# EAGLE board Controller Board v2 (EAGLE 5.06)

Size 58.09 x 33.01 mm. Coordinates in mm from the lower left corner, seen from the top.
Outline: 0,0 58.09,0 58.09,33.01 0,33.01 0,0
Copper layers (1*2+15*16): Top 0.035mm / dielectric 0.2mm / Route2 0.035mm / dielectric 1.5mm / Route15 0.035mm / dielectric 0.2mm / Bottom 0.035mm
Design rules "4 layer": minimum track width 10mil, minimum drill 24mil, track to track 8mil, track to pad 8mil, pad to pad 8mil, via to via 8mil, smd to smd 8mil, copper to edge 40mil, drill to drill 8mil, minimum pad ring 10mil, minimum via ring 8mil, stop-mask expansion 4mil, vias tented up to drill 0mil, thermal gap 10mil
Holes 3.58 mm at 54.61,17.78 22.86,2.54 17.78,30.48
tRestrict: area 20.3,6.3 to 21.6,27.9
bRestrict: area 20.3,6.3 to 21.6,27.9
Milling: area 20.3,5.1 to 21.6,29.2

## Footprints (pad centres in the part's own frame; a part is rotated, then mirrored left to right if it is on the bottom)
C0805 = smd 1.3 x 1.5: 1 -0.95,0; 2 0.95,0
SOT223 = smd 1.219 x 2.235: 1 -2.311,-3.099; 2 0,-3.099; 3 2.311,-3.099 | smd 3.6 x 2.2: 4 0,3.099
TSSOP8 = smd 0.35 x 1.2: 1 -0.975,-2.925; 2 -0.325,-2.925; 3 0.325,-2.925; 4 0.975,-2.925; 5 0.975,2.925; 6 0.325,2.925; 7 -0.325,2.925; 8 -0.975,2.925
794623-4 = smd 1.3 x 2.92: 1 1.5,10.1; 2 1.5,5.48; 3 -1.5,10.1; 4 -1.5,5.48 | hole 3: 0,0
JP1 = drill 0.914 long: 1 0,-1.27; 2 0,1.27
HC49UP = smd 5.334 x 1.93: 1 -4.826,0; 2 4.826,0
R0603 = smd 1 x 1.1: 1 -0.85,0; 2 0.85,0
MA04-2 = drill 1.016 octagon: 1 -3.81,-1.27; 2 -3.81,1.27; 3 -1.27,-1.27; 4 -1.27,1.27; 5 1.27,-1.27; 6 1.27,1.27; 7 3.81,-1.27; 8 3.81,1.27
P1-13 = drill 1.321 pad 2.159 octagon: 1 0,0
P8X32A-Q44 = smd 1.9 x 0.4: 1 -5.713,4.013; 2 -5.713,3.212; 3 -5.713,2.413; 4 -5.713,1.613; 5 -5.713,0.812; 6 -5.713,0.013; 7 -5.713,-0.787; 8 -5.713,-1.587; 9 -5.713,-2.388; 10 -5.713,-3.188; 11 -5.713,-3.987; 23 5.688,-3.987; 24 5.688,-3.188; 25 5.688,-2.388; 26 5.688,-1.587; 27 5.688,-0.787; 28 5.688,0.013; 29 5.688,0.812; 30 5.688,1.613; 31 5.688,2.413; 32 5.688,3.212; 33 5.688,4.013 | smd 0.4 x 1.9: 12 -4.013,-5.688; 13 -3.212,-5.688; 14 -2.413,-5.688; 15 -1.613,-5.688; 16 -0.812,-5.688; 17 -0.013,-5.688; 18 0.787,-5.688; 19 1.587,-5.688; 20 2.388,-5.688; 21 3.188,-5.688; 22 3.987,-5.688; 34 3.987,5.713; 35 3.188,5.713; 36 2.388,5.713; 37 1.587,5.713; 38 0.787,5.713; 39 -0.013,5.713; 40 -0.812,5.713; 41 -1.613,5.713; 42 -2.413,5.713; 43 -3.212,5.713; 44 -4.013,5.713
PDIP14-7 = drill 1 square: P$1 -8.89,-3.81; P$2 -6.35,-3.81; P$3 1.27,-3.81; P$4 3.81,-3.81; P$5 6.35,-3.81; P$6 6.35,3.81; P$7 -8.89,3.81
DUB-8 = smd 2 x 1: P$1 -4.572,3.556; P$2 -4.572,1.016; P$3 -4.572,-1.524; P$4 -4.572,-4.064; P$5 4.678,-4.064; P$6 4.678,-1.524; P$7 4.678,1.016; P$8 4.678,3.556
TSSOP20 = smd 0.305 x 0.991: 1 -2.925,-2.918; 2 -2.275,-2.918; 3 -1.625,-2.918; 4 -0.975,-2.918; 5 -0.325,-2.918; 6 0.325,-2.918; 7 0.975,-2.918; 8 1.625,-2.918; 9 2.275,-2.918; 10 2.925,-2.918; 11 2.925,2.918; 12 2.275,2.918; 13 1.625,2.918; 14 0.975,2.918; 15 0.325,2.918; 16 -0.325,2.918; 17 -0.975,2.918; 18 -1.625,2.918; 19 -2.275,2.918; 20 -2.925,2.918
S08N = smd 0.6 x 1.3: P$1 -2.54,-2.667; P$2 -1.27,-2.667; P$3 0,-2.667; P$4 1.27,-2.667; P$5 1.27,2.587; P$6 0,2.587; P$7 -1.27,2.587; P$8 -2.54,2.587
USB-MINIB = smd 2.5 x 0.5: D+ 2.5,0; D- 2.5,0.8; GND 2.5,-1.6; ID 2.5,-0.8; VBUS 2.5,1.6 | smd 2.5 x 2: GND@1 -3,-4.5; GND@2 -3,4.5; GND@3 2.5,4.5; GND@4 2.5,-4.5 | hole 0.9: 0,2.2; 0,-2.2
15-91-02 = smd 1.651 x 5.334: 1 -1.27,-10.795; 2 1.27,-10.795 | hole 3.404: -2.667,0.838; 2.667,0.838

## Placement (x,y rotation side)
C1  3.3uF  [C0805]  29.21,16.51 270 bottom
C2  2.2uF  [C0805]  13.97,16.51 270 bottom
C3  1uF  [C0805]  35.56,5.08 90 top
IC1  [SOT223]  29.21,6.35 90 top
IC2  24LCS52ST  [TSSOP8]  33.02,17.78 180 bottom
J1  794623-4  [794623-4]  3.81,6.35 270 top
J2  794623-4  [794623-4]  3.81,26.67 270 top
JP1  [JP1]  17.78,3.81 180 top
Q1  5Mhz  [HC49UP]  31.75,7.62 0 bottom
Q2  16Mhz  [HC49UP]  31.75,26.67 0 bottom
R1  10k  [R0603]  35.56,8.89 270 top
R2  120  [R0603]  17.78,8.89 90 bottom
R3  [R0603]  49.53,3.81 180 top
R4  [R0603]  49.53,6.35 180 top
R5  [R0603]  49.53,8.89 180 top
R6  [R0603]  49.53,11.43 180 top
R7  [R0603]  50.8,16.51 270 bottom
R8  [R0603]  50.8,20.32 270 bottom
R9  [R0603]  50.8,24.13 270 bottom
R10  [R0603]  50.8,27.94 270 bottom
SV1  [MA04-2]  54.61,7.62 270 top
SV2  [MA04-2]  54.61,26.67 270 top
TP1  TPPAD1-13  [P1-13]  40.64,30.48 0 top
TP2  TPPAD1-13  [P1-13]  43.18,30.48 0 top
TP3  TPPAD1-13  [P1-13]  45.72,30.48 0 top
TP4  TPPAD1-13  [P1-13]  45.72,27.94 0 top
U$1  P8X32A-Q44  [P8X32A-Q44]  40.64,19.05 180 top
U$2  TI-DCP020505  [PDIP14-7]  22.86,16.51 0 top
U$3  TI-ISO1050  [DUB-8]  21.59,19.05 0 bottom
U$4  MCP2515TSOP  [TSSOP20]  29.21,26.67 270 top
U$5  M25PE20  [S08N]  40.64,19.05 180 bottom
X1  USBSMD  [USB-MINIB]  45.72,5.08 90 bottom
X2  C-GRID-02-15-19  [15-91-02]  3.81,16.51 90 top

## Library data of the parts
C1-C3 R1-R10 = rcl
IC1 = linear-technology
IC2 = microchip
J1 J2 = con-amp
JP1 = jumper
Q1 Q2 = crystal
SV1 SV2 = con-lstb
TP1-TP4 = testpad
U$1 = parallax_propeller
U$2 U$3 = isodcdc
U$4 = MCP2515_MT
U$5 = Flash
X1 = SparkFun
X2 = con-molex

## Nets
+5V: C2.1 J1.1 J2.1 U$2.P$1 U$3.P$8 X2.1
GND: C2.2 J1.3 J2.3 U$2.P$2 U$3.P$5 X2.2
N$1: Q1.1 U$1.28
N$2: Q1.2 U$1.29
N$3: IC2.6 U$1.35
N$4: IC2.5 R1.1 U$1.36
N$5: U$1.7 X1.VBUS
N$6: U$1.38 X1.D-
N$7: U$1.37 X1.D+
N$8: U$1.25 U$4.11
N$9: TP4.1 U$1.24 U$4.12
N$10: J1.4 J2.4 R2.2 U$3.P$6
N$11: J1.2 J2.2 JP1.1 U$3.P$7
N$12: U$1.33 U$5.P$6
N$13: U$1.34 U$5.P$5
N$14: U$1.32 U$5.P$1
N$15: U$1.31 U$5.P$2
N$16: U$1.23 U$4.13
N$17: TP3.1 U$1.22 U$4.14
N$18: Q2.1 U$1.26 U$4.9
N$19: Q2.2 U$4.8
N$20: U$3.P$2 U$4.2
N$21: U$3.P$3 U$4.1
N$22: JP1.2 R2.1
N$23: TP2.1 U$1.21 U$4.16 U$4.17
N$24: TP1.1 U$1.20 U$4.18
N$25: U$1.19 U$4.19
N$26: R3.2 U$1.41
N$27: R4.2 U$1.42
N$28: R5.2 U$1.43
N$29: R6.2 U$1.44
N$30: R7.2 U$1.1
N$31: R8.2 U$1.2
N$32: R9.2 U$1.3
N$33: R10.2 U$1.4
N$34: R6.1 SV1.1
N$35: R5.1 SV1.3
N$37: R3.1 SV1.7
N$38: R7.1 SV2.7
N$39: R8.1 SV2.5
N$40: R9.1 SV2.3
N$41: R10.1 SV2.1
N$44: R4.1 SV1.5
VCC: C3.1 IC1.1 SV1.8 SV2.8 U$2.P$4
VDD: C1.1 IC1.3 IC2.8 R1.2 SV1.6 SV2.6 U$1.8 U$1.18 U$1.30 U$1.40 U$3.P$1 U$4.20 U$5.P$3 U$5.P$7 U$5.P$8
VSS: C1.2 C3.2 IC1.2 IC1.4 IC2.1 IC2.2 IC2.3 IC2.4 IC2.7 SV1.2 SV1.4 SV2.2 SV2.4 U$1.5 U$1.6 U$1.17 U$1.27 U$1.39 U$2.P$3 U$3.P$4 U$4.10 U$5.P$4 X1.GND

## Tracks (layer width: path | path; a pad name or v marks a point on that pad's centre or on a via)
+5V  (5 unrouted)
GND  (5 unrouted)
N$1  (1 unrouted)
N$2  (1 unrouted)
N$3  (1 unrouted)
N$4  (2 unrouted)
N$5  (1 unrouted)
N$6  (1 unrouted)
N$7  (1 unrouted)
N$8  (1 unrouted)
N$9  (2 unrouted)
N$10  (3 unrouted)
N$11  (3 unrouted)
N$12  (1 unrouted)
N$13  (1 unrouted)
N$14  (1 unrouted)
N$15  (1 unrouted)
N$16  (1 unrouted)
N$17  (2 unrouted)
N$18  (2 unrouted)
N$19  (1 unrouted)
N$20  (1 unrouted)
N$21  (1 unrouted)
N$22  (1 unrouted)
N$23  (3 unrouted)
N$24  (2 unrouted)
N$25  (1 unrouted)
N$26  (1 unrouted)
N$27  (1 unrouted)
N$28  (1 unrouted)
N$29  (1 unrouted)
N$30  (1 unrouted)
N$31  (1 unrouted)
N$32  (1 unrouted)
N$33  (1 unrouted)
N$34  (1 unrouted)
N$35  (1 unrouted)
N$37  (1 unrouted)
N$38  (1 unrouted)
N$39  (1 unrouted)
N$40  (1 unrouted)
N$41  (1 unrouted)
N$44  (1 unrouted)
VCC  (4 unrouted)
VDD  (14 unrouted)
VSS  (22 unrouted)